# Altium PCB mp1584.PcbDoc
Units mil, origin at the board's own origin, x right, y up, seen from the top; angles counter-clockwise.
Board outline 1535.03 x 1310.03 mil, 2 copper layers (Top Layer, Bottom Layer); 20 components, 11 nets, 47 pads, 0 vias.
Unrouted connection lines stored in the file: 36.
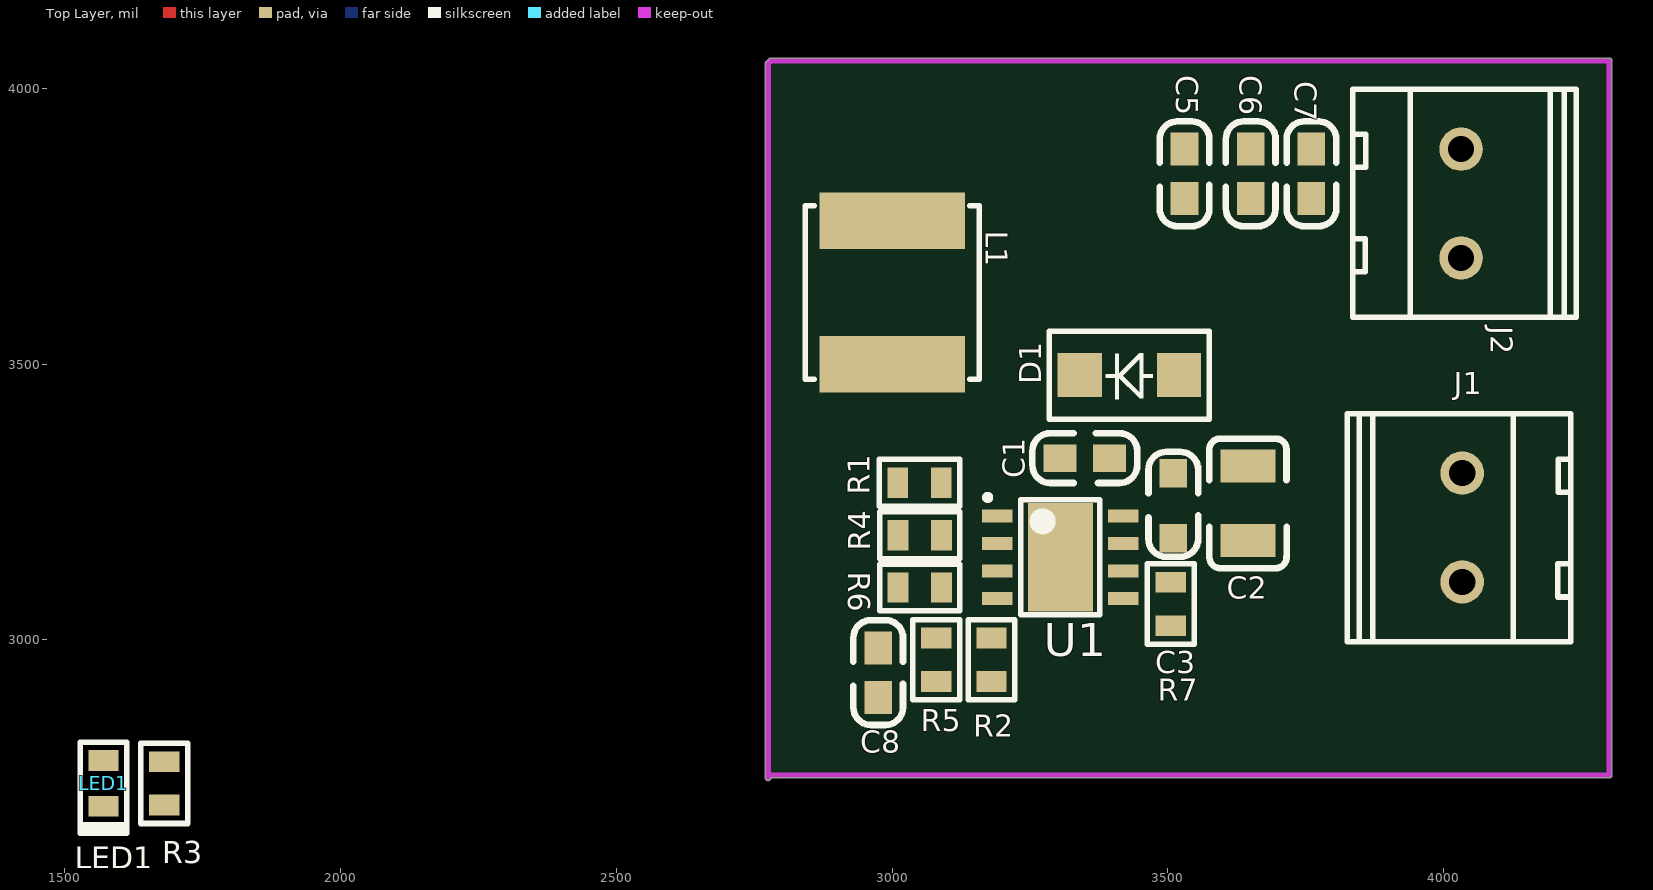
[diagram p0: Top Layer view]
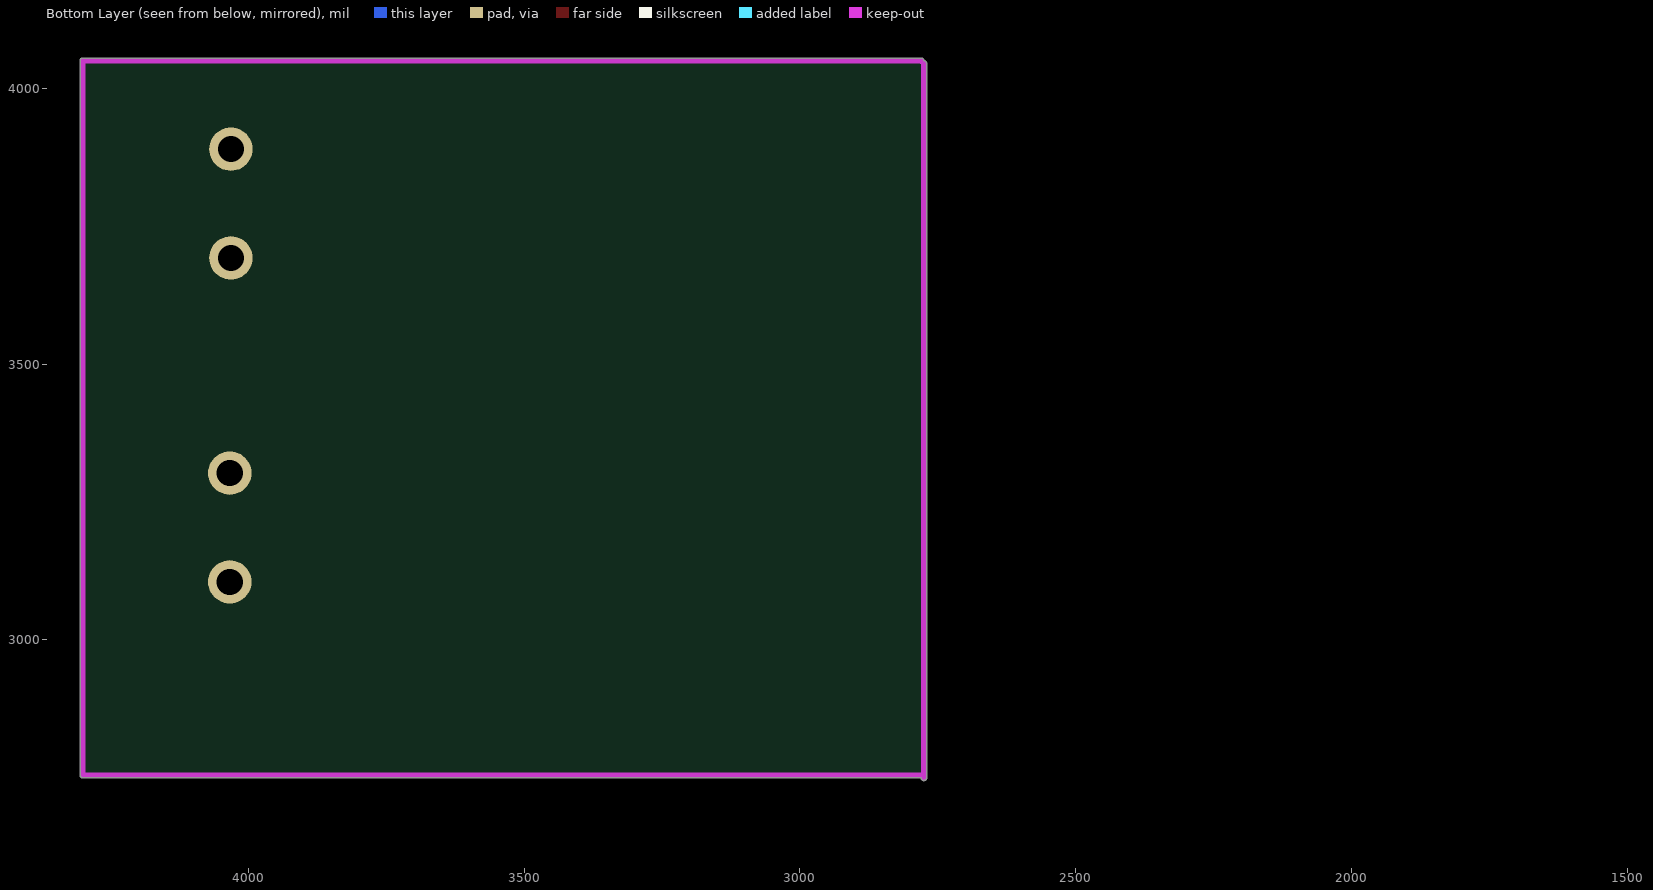
[diagram p1: Bottom Layer view, seen from below]

## Layer stack, top to bottom
Top Solder: solder mask 0.4, Solder Resist, Dk 3.5
Top Layer: signal copper 1.4
Dielectric 1: dielectric 12.6, FR-4, Dk 4.8
Bottom Layer: signal copper 1.4
Bottom Solder: solder mask 0.4, Solder Resist, Dk 3.5

## Board outline
2769.99,2750 2769.99,4045 cw(c2775,4045) 2774.99,4050.01 cw(c2780,4050) 2780,4055.01 4300,4055.01 cw(c4300,4050) 4303.55,4053.55 ccw(c4300,4050) 4300,4055.01 4303.55,4053.55 cw(c4300,4050) 4305.02,4050 4305.02,2755 cw(c4300,2755) 4300,2749.99 2780.01,2749.99 cw(c2775,2750)

## Design rules (kind name [scope] priority, off if disabled: settings)
Clearance ClearancePolygon [InPolygon] p1: gap=8 ignorepadtopadclearanceinfootprint=FALSE except(0: Arc-Hole Track-Hole SMDPad-Hole THPad-Hole Via-Hole Fill-Hole Poly-Hole Region-Hole Text-Hole)
Clearance [All] p2: gap=6 ignorepadtopadclearanceinfootprint=FALSE
ComponentClearance [All] p1: gap=0 collisioncheckmode=3 verticalgap=0 showdistances=FALSE
Height [All] p1: minheight=0 maxheight=5000 prefheight=500
HoleSize [All] p1: absolutevalues=TRUE maxlimit=200 minlimit=1 maxpercent=80.000 minpercent=20.000
HoleToHoleClearance [All] p1: gap=6 allowstackedmicrovias=TRUE
MinimumAnnularRing [All] p1: minimumring=4
MinimumSolderMaskSliver [All] p1: minsoldermaskwidth=0
MinimumSolderMaskSliver SilkToSolderMaskClearance [IsPad] p2: minsoldermaskwidth=10
PlaneConnect [All] p1: planeconnectstyle=Direct reliefexpansion=20 reliefentries=4 reliefconductorwidth=10 reliefairgap=10
PolygonConnect [All] p1: connectstyle=Direct reliefconductorwidth=10 reliefentries=4 polygonreliefangle="90 Angle" airgapwidth=10
RoutingVias [All] p1: holewidth=12 width=24 viastyle="Through Hole" minholewidth=12 minwidth=20 maxholewidth=28 maxwidth=50
SilkToSilkClearance [All] p1: silktosilkclearance=0
SilkToSolderMaskClearance SilkToSolderMaskClearance_1 [IsPad] p1: minsilkscreentomaskgap=10 clearancetoexposedcopper=TRUE
SolderMaskExpansion [All] p1: expansion=2 istentingtop=FALSE
Width [All] p1: maxlimit=100 minlimit=6 preferedwidth=10
22 further rules are at their usual default settings.

## Classes and differential pairs
component class MP2307: C1 C2 C3 C5 C6 C7 D1 J1 J2 L1 LED1 R2 R3 R5 R6 U1

## Components (designator, comment, footprint, x,y, rotation, side; value= is the part's Value field where it differs from the comment)
C1 "100nf" 0805C#1 3305,3330 r0 top
C2 "22uf" 1210C 3645,3315 r270 top
C3 "100nf" 0805C#2 3510,3290 r270 top
C5 "100nf" 0805C#1 3530.4,3889.29 r270 top
C6 "22uf" 0805C#1 3650.4,3889.29 r270 top
C7 "22uf" 0805C#1 3760.4,3889.29 r270 top
C8 "4.7nf" 0805C#1 2975,2985 r270 top
D1 "SS34" SMB/DO-214AA 3520,3480 r180 top
J1 "HDR1x2" CONN-TH_2P-P5.00_WJ128V-5.0-2P 4030,3205 r270 top
J2 "HDR1x2" CONN-TH_2P-P5.00_WJ128V-5.0-2P 4035,3790 r90 top
L1 "10uh" IND-SMD_L8.0-W8.0_SMNR8040 3000,3630 r90 top
LED1 "LED" LED-0805 1570,2740 r270 top
R1 "100k" 0805 3049.37,3285 r180 top
R2 "20k" 0805 3180,2964.01 r270 top
R3 "10k" 0805 1680,2740 r270 top
R4 "100k" 0805 3050,3190 r180 top (schematic designator R1)
R5 "4.5k" 0805 3080,2964.01 r90 top
R6 "10k" 0805 3050,3095 r0 top
R7 "10k" 0805 3505,3065 r270 top (schematic designator R5)
U1 "MP2307" SO-8 3305,3150 r0 top

## Footprints (in the part's own frame and the unit in brackets; to place one, negate y for a bottom-side part, rotate by r counter-clockwise, add the part's x,y. Pads: shape width x height; smd on the part's side, far side on the other; paste and mask are expansions set on the pad)
0805 [mm] "SMD, 0805"
  rect 0.95x1.4 smd: 1(-1,0) 2(1,0)
  silkscreen extent -1.85,-1.08 1.85,1.08, body extent -1,-0.62 1,0.63, height 0.45
0805C#1 [mil]
  rect 60x50 smd: 1(-0.71,-0.4) 2(89.29,-0.4)
  silkscreen extent -51,-45 139,45, body extent 6,-25 84,25, height 31
0805C#2 [mil]
  rect 51.18x50 smd: 1(-12.32,-0.4) 2(105.79,-0.4)
  silkscreen extent -51,-45 139,45, body extent 6,-25 84,25, height 31
1210C [mil]
  rect 60x100 smd: 1(0,0) 2(135,0)
  silkscreen extent -50,-70 185,70, body extent -9,-49 149,49, height 67
CONN-TH_2P-P5.00_WJ128V-5.0-2P [mm]
  round 2 hole 1.2: 1(-2.476,0.088) 2(2.533,0.088)
  silkscreen extent -5.21,-5.21 5.29,5.09
IND-SMD_L8.0-W8.0_SMNR8040 [mm]
  rect 2.6x6.7 smd: 1(-3.3,0) 2(3.3,0)
  silkscreen extent -4,-4 4,4
LED-0805 [mm] "LED, SMD, 0805"
  rect 0.95x1.4 smd: 1(-1.05,0) 2(1.05,0)
  silkscreen extent -1.9,-1.08 2.3,1.08, body extent -1.03,-0.46 1.03,0.45, height 0.85
SMB/DO-214AA [mil] "塑封二极管"
  rect 80x80 smd: A(0,0) K(180,0)
  silkscreen extent -55,-80 235,80, body extent -20,-79 200,75, height 98
SO-8 [mm] "SOIC, 8PIN"
  rect 3x5 smd: 0(0,0)
  rect 1.4x0.6 smd: 1(-2.9,1.905) 2(-2.9,0.635) 3(-2.9,-0.635) 4(-2.9,-1.905) 5(2.9,-1.905) 6(2.9,-0.635) 7(2.9,0.635) 8(2.9,1.905)
  silkscreen extent -3.48,-2.65 1.82,2.88, body extent -3.03,-2.57 3.03,2.57, height 1.95

## Part data
C1 C2 C3 C5 C6 C7 C8: library part CAP, "无极性电容"
D1: library part SS1x, "Schottky Diode"
J1 J2: "Connector"
L1: library part 电感, "SWPA8040S100MT"
R1 R2 R3 R4 R5 R6 R7: library part RES, "Resistor"
U1: library part MP2307_1

## Nets (pads, with @x,y where several pads share a name; then routed paths per layer and width w, separated by ;. In a path a pad name is that pad's centre, name@x,y a point inside that pad or via, vN(x,y) a via of type N, cw(c..) or ccw(c..) an arc to the next point about the centre after c; other vN are vias at no path point)
GND: C2.1 C3.1 C5.2 C6.2 C7.2 C8.2 D1.A J1.2 J2.1 LED1.2 R4.2 R5.1 R7.2 U1.0 U1.5
NetC1_1: C1.1 D1.K L1.1 U1.1
NetC1_2: C1.2 U1.8
NetC4_2: R7.1 U1.6
NetC8_1: C8.1 R6.1
NetLED1_1: LED1.1 R3.1
NetR1_1: R1.1 R4.1 U1.2
NetR2_1: R2.1 R5.2 U1.4
NetR6_2: R6.2 U1.3
VIN: C2.2 C3.2 J1.1 R1.2 U1.7
VO: C5.1 C6.1 C7.1 J2.2 L1.2 R2.2 R3.2

## Polygon pours and split planes (outlines as drawn)
NetC1_1 on Top Layer "NETC1_1_L01_P026" (solid, remove dead copper, pour order 26): 1555,2960
NetC1_1 on Top Layer "NETC1_1_L01_P024" (solid, remove dead copper, pour order 24): 2700,3160
VO on Top Layer "VO_L01_P021" (solid, remove dead copper, pour order 21): 1570,3015

## Keep-outs
Keep-Out Layer:
  lines w10: 4300,4050 2780,4050 2775,4045 2775,2750 2780,2755 4300,2755 4300,3840 4300,4050 ; 4300,4050 4300,4050

## Other copper
Top Layer:
  text "VIN" at 2745.14,4180 h150
  text "GND" at 3180,4176.25 h150